# EAGLE board Magnetic-Imaging-Tile-Panel (EAGLE 9.6.2), part 1 of 5
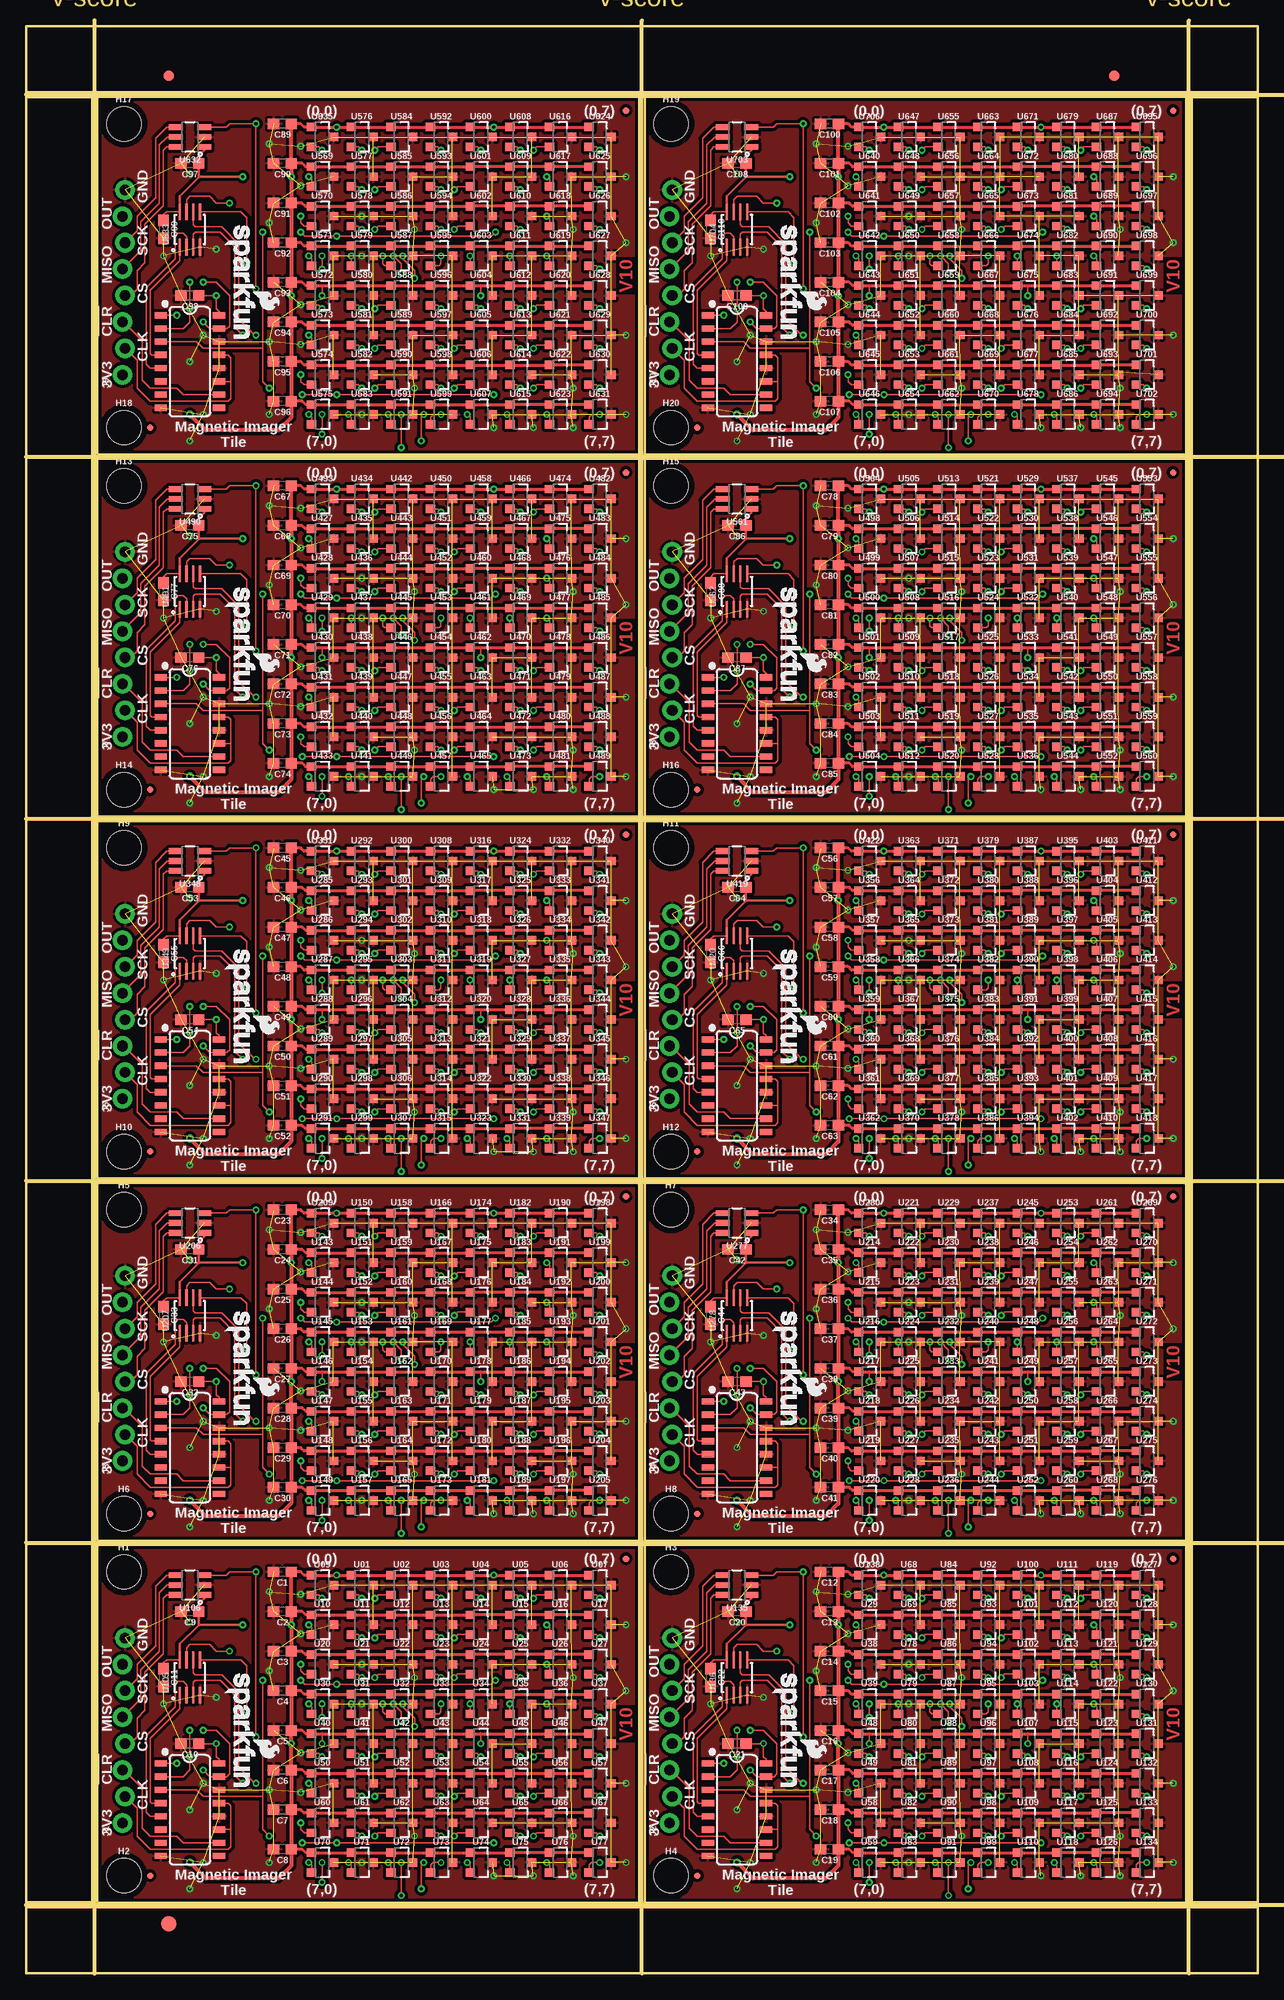
[diagram p0: board, top side]
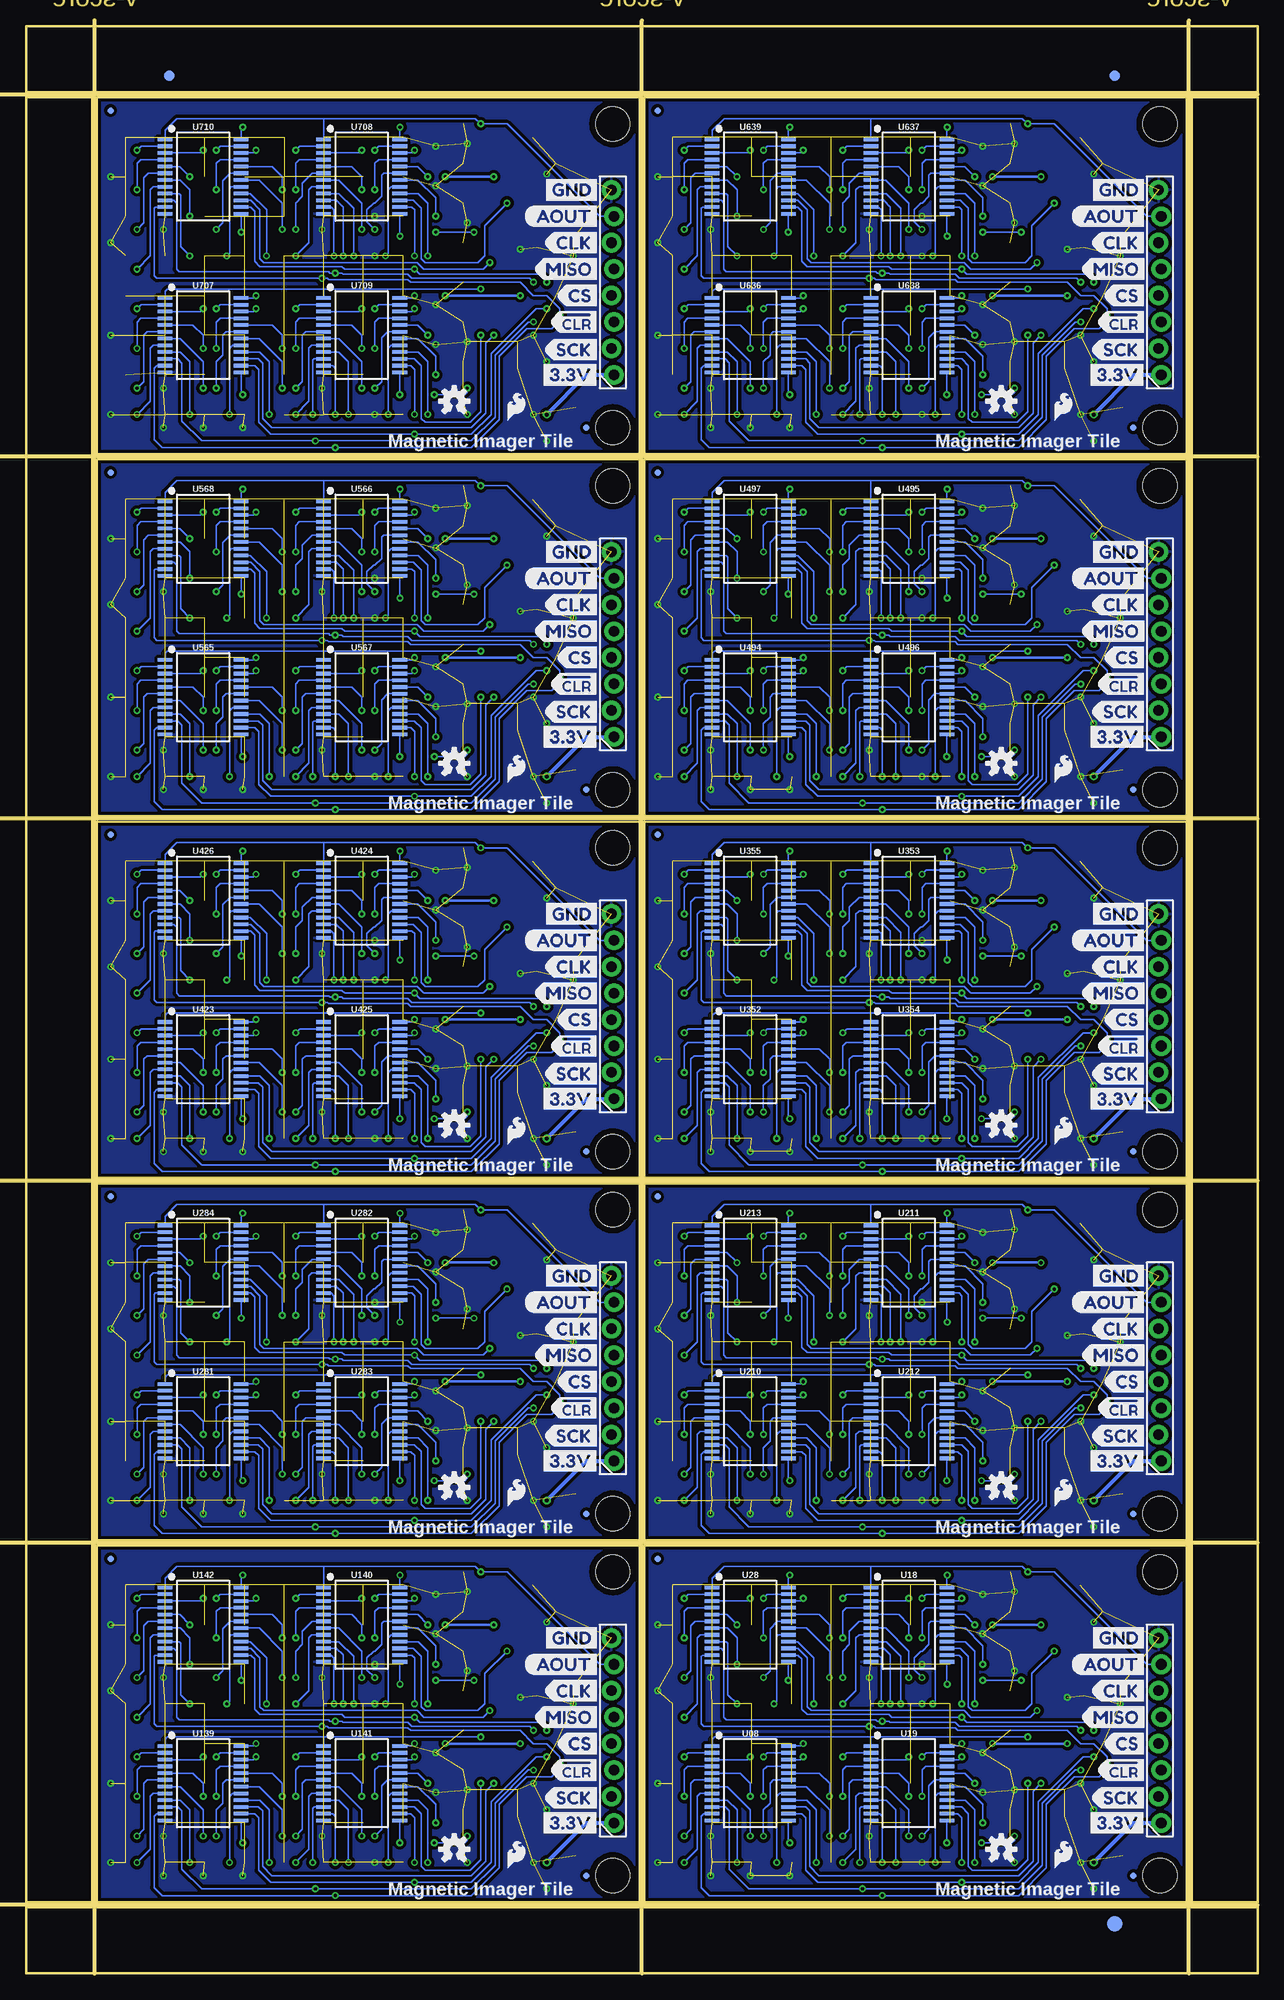
[diagram p1: board, bottom side, seen from below]

Size 118.36 x 187.2 mm. Coordinates in mm from the lower left corner, seen from the top.
Outline: 6.86,6.86 58.93,6.86 58.93,41.15 6.86,41.15 6.86,6.86
Outline: 59.44,6.86 111.51,6.86 111.51,41.15 59.44,41.15 59.44,6.86
Outline: 6.86,41.66 58.93,41.66 58.93,75.95 6.86,75.95 6.86,41.66
Outline: 59.44,41.66 111.51,41.66 111.51,75.95 59.44,75.95 59.44,41.66
Outline: 6.86,76.45 58.93,76.45 58.93,110.74 6.86,110.74 6.86,76.45
Outline: 59.44,76.45 111.51,76.45 111.51,110.74 59.44,110.74 59.44,76.45
Outline: 6.86,111.25 58.93,111.25 58.93,145.54 6.86,145.54 6.86,111.25
Outline: 59.44,111.25 111.51,111.25 111.51,145.54 59.44,145.54 59.44,111.25
Outline: 6.86,146.05 58.93,146.05 58.93,180.34 6.86,180.34 6.86,146.05
Outline: 59.44,146.05 111.51,146.05 111.51,180.34 59.44,180.34 59.44,146.05
Outline: 0,6.35 118.36,6.35 118.36,0 0,0 0,6.35
Outline: 112.01,180.34 118.36,180.34 118.36,6.86 112.01,6.86 112.01,180.34
Outline: 0,187.2 118.36,187.2 118.36,180.85 0,180.85 0,187.2
Outline: 0,180.34 6.35,180.34 6.35,6.86 0,6.86 0,180.34
Copper layers (1*16): Top 0.035mm / dielectric 1.5mm / Bottom 0.035mm
Design rules "Magnetic-Imaging-Tile": minimum track width 6mil, minimum drill 0.3mm, track to track 6mil, track to pad 6mil, pad to pad 6mil, via to via 6mil, smd to smd 6mil, copper to edge 6mil, drill to drill 6mil, minimum pad ring 7mil, minimum via ring 7mil, stop-mask expansion 4mil, vias tented up to drill 25mil, thermal gap 10mil
Milling: 9 lines

## Footprints (pad centres in the part's own frame; a part is rotated, then mirrored left to right if it is on the bottom)
0603 = smd 1.1 x 1: 1 -0.85,0; 2 0.85,0
FIDUCIAL-1X2 = smd 1 x 1: 1 0,0
FIDUCIAL-1.5X3 = smd 1.5 x 1.5: 1 0,0
FIDUCIAL-MICRO = smd 0.635 x 0.635: 1 0,0
STAND-OFF = hole 3.302: 0,0
1X08_LOCK_NO_SILK = drill 1.016 pad 1.88: 1 0,0.127; 2 2.54,-0.127; 3 5.08,0.127; 4 7.62,-0.127; 5 10.16,0.127; 6 12.7,-0.127; 7 15.24,0.127; 8 17.78,-0.127
SOT23-3 = smd 0.8 x 0.9: 1 -0.95,-1; 2 0.95,-1; 3 0,1.1
SSOP24 = smd 0.348 x 1.397: 1 -3.575,-3.656; 2 -2.925,-3.656; 3 -2.275,-3.656; 4 -1.625,-3.656; 5 -0.975,-3.656; 6 -0.325,-3.656; 7 0.325,-3.656; 8 0.975,-3.656; 9 1.625,-3.656; 10 2.275,-3.656; 11 2.925,-3.656; 12 3.575,-3.656; 13 3.575,3.656; 14 2.925,3.656; 15 2.275,3.656; 16 1.625,3.656; 17 0.975,3.656; 18 0.325,3.656; 19 -0.325,3.656; 20 -0.975,3.656; 21 -1.625,3.656; 22 -2.275,3.656; 23 -2.925,3.656; 24 -3.575,3.656
SO16 = smd 0.6 x 1.2: 1 -4.445,-2.8; 2 -3.175,-2.8; 3 -1.905,-2.8; 4 -0.635,-2.8; 5 0.635,-2.8; 6 1.905,-2.8; 7 3.175,-2.8; 8 4.445,-2.8; 9 4.445,2.8; 10 3.175,2.8; 11 1.905,2.8; 12 0.635,2.8; 13 -0.635,2.8; 14 -1.905,2.8; 15 -3.175,2.8; 16 -4.445,2.8
SM8 = smd 1.55 x 0.25: 1 -1.7,0.975; 2 -1.7,0.325; 3 -1.7,-0.325; 4 -1.7,-0.975; 5 1.7,-0.975; 6 1.7,-0.325; 7 1.7,0.325; 8 1.7,0.975
SOT23-6 = smd 0.55 x 1.35: 1 -0.95,-1.375; 2 0,-1.375; 3 0.95,-1.375; 4 0.95,1.375; 5 0,1.375; 6 -0.95,1.375

## Placement (x,y rotation side)
C1  4.7uF  [0603]  24.64,38.61 180 top
C2  4.7uF  [0603]  24.64,34.8 180 top
C3  4.7uF  [0603]  24.64,30.99 180 top
C4  4.7uF  [0603]  24.64,27.18 180 top
C5  4.7uF  [0603]  24.64,23.37 180 top
C6  4.7uF  [0603]  24.64,19.56 180 top
C7  4.7uF  [0603]  24.64,15.75 180 top
C8  4.7uF  [0603]  24.64,11.94 180 top
C9  0.1uF  [0603]  15.75,34.8 180 top
C10  0.1uF  [0603]  15.75,22.1 180 top
C11  0.1uF  [0603]  13.21,28.45 270 top
C12  4.7uF  [0603]  77.22,38.61 180 top
C13  4.7uF  [0603]  77.22,34.8 180 top
C14  4.7uF  [0603]  77.22,30.99 180 top
C15  4.7uF  [0603]  77.22,27.18 180 top
C16  4.7uF  [0603]  77.22,23.37 180 top
C17  4.7uF  [0603]  77.22,19.56 180 top
C18  4.7uF  [0603]  77.22,15.75 180 top
C19  4.7uF  [0603]  77.22,11.94 180 top
C20  0.1uF  [0603]  68.33,34.8 180 top
C21  0.1uF  [0603]  68.33,22.1 180 top
C22  0.1uF  [0603]  65.79,28.45 270 top
C23  4.7uF  [0603]  24.64,73.41 180 top
C24  4.7uF  [0603]  24.64,69.6 180 top
C25  4.7uF  [0603]  24.64,65.79 180 top
C26  4.7uF  [0603]  24.64,61.98 180 top
C27  4.7uF  [0603]  24.64,58.17 180 top
C28  4.7uF  [0603]  24.64,54.36 180 top
C29  4.7uF  [0603]  24.64,50.55 180 top
C30  4.7uF  [0603]  24.64,46.74 180 top
C31  0.1uF  [0603]  15.75,69.6 180 top
C32  0.1uF  [0603]  15.75,56.9 180 top
C33  0.1uF  [0603]  13.21,63.25 270 top
C34  4.7uF  [0603]  77.22,73.41 180 top
C35  4.7uF  [0603]  77.22,69.6 180 top
C36  4.7uF  [0603]  77.22,65.79 180 top
C37  4.7uF  [0603]  77.22,61.98 180 top
C38  4.7uF  [0603]  77.22,58.17 180 top
C39  4.7uF  [0603]  77.22,54.36 180 top
C40  4.7uF  [0603]  77.22,50.55 180 top
C41  4.7uF  [0603]  77.22,46.74 180 top
C42  0.1uF  [0603]  68.33,69.6 180 top
C43  0.1uF  [0603]  68.33,56.9 180 top
C44  0.1uF  [0603]  65.79,63.25 270 top
C45  4.7uF  [0603]  24.64,108.2 180 top
C46  4.7uF  [0603]  24.64,104.39 180 top
C47  4.7uF  [0603]  24.64,100.58 180 top
C48  4.7uF  [0603]  24.64,96.77 180 top
C49  4.7uF  [0603]  24.64,92.96 180 top
C50  4.7uF  [0603]  24.64,89.15 180 top
C51  4.7uF  [0603]  24.64,85.34 180 top
C52  4.7uF  [0603]  24.64,81.53 180 top
C53  0.1uF  [0603]  15.75,104.39 180 top
C54  0.1uF  [0603]  15.75,91.69 180 top
C55  0.1uF  [0603]  13.21,98.04 270 top
C56  4.7uF  [0603]  77.22,108.2 180 top
C57  4.7uF  [0603]  77.22,104.39 180 top
C58  4.7uF  [0603]  77.22,100.58 180 top
C59  4.7uF  [0603]  77.22,96.77 180 top
C60  4.7uF  [0603]  77.22,92.96 180 top
C61  4.7uF  [0603]  77.22,89.15 180 top
C62  4.7uF  [0603]  77.22,85.34 180 top
C63  4.7uF  [0603]  77.22,81.53 180 top
C64  0.1uF  [0603]  68.33,104.39 180 top
C65  0.1uF  [0603]  68.33,91.69 180 top
C66  0.1uF  [0603]  65.79,98.04 270 top
C67  4.7uF  [0603]  24.64,143 180 top
C68  4.7uF  [0603]  24.64,139.19 180 top
C69  4.7uF  [0603]  24.64,135.38 180 top
C70  4.7uF  [0603]  24.64,131.57 180 top
C71  4.7uF  [0603]  24.64,127.76 180 top
C72  4.7uF  [0603]  24.64,123.95 180 top
C73  4.7uF  [0603]  24.64,120.14 180 top
C74  4.7uF  [0603]  24.64,116.33 180 top
C75  0.1uF  [0603]  15.75,139.19 180 top
C76  0.1uF  [0603]  15.75,126.49 180 top
C77  0.1uF  [0603]  13.21,132.84 270 top
C78  4.7uF  [0603]  77.22,143 180 top
C79  4.7uF  [0603]  77.22,139.19 180 top
C80  4.7uF  [0603]  77.22,135.38 180 top
C81  4.7uF  [0603]  77.22,131.57 180 top
C82  4.7uF  [0603]  77.22,127.76 180 top
C83  4.7uF  [0603]  77.22,123.95 180 top
C84  4.7uF  [0603]  77.22,120.14 180 top
C85  4.7uF  [0603]  77.22,116.33 180 top
C86  0.1uF  [0603]  68.33,139.19 180 top
C87  0.1uF  [0603]  68.33,126.49 180 top
C88  0.1uF  [0603]  65.79,132.84 270 top
C89  4.7uF  [0603]  24.64,177.8 180 top
C90  4.7uF  [0603]  24.64,173.99 180 top
C91  4.7uF  [0603]  24.64,170.18 180 top
C92  4.7uF  [0603]  24.64,166.37 180 top
C93  4.7uF  [0603]  24.64,162.56 180 top
C94  4.7uF  [0603]  24.64,158.75 180 top
C95  4.7uF  [0603]  24.64,154.94 180 top
C96  4.7uF  [0603]  24.64,151.13 180 top
C97  0.1uF  [0603]  15.75,173.99 180 top
C98  0.1uF  [0603]  15.75,161.29 180 top
C99  0.1uF  [0603]  13.21,167.64 270 top
C100  4.7uF  [0603]  77.22,177.8 180 top
C101  4.7uF  [0603]  77.22,173.99 180 top
C102  4.7uF  [0603]  77.22,170.18 180 top
C103  4.7uF  [0603]  77.22,166.37 180 top
C104  4.7uF  [0603]  77.22,162.56 180 top
C105  4.7uF  [0603]  77.22,158.75 180 top
C106  4.7uF  [0603]  77.22,154.94 180 top
C107  4.7uF  [0603]  77.22,151.13 180 top
C108  0.1uF  [0603]  68.33,173.99 180 top
C109  0.1uF  [0603]  68.33,161.29 180 top
C110  0.1uF  [0603]  65.79,167.64 270 top
E$1  [FIDUCIAL-1X2]  13.72,182.44 0 top
E$2  [FIDUCIAL-1X2]  13.72,182.44 0 bottom
E$3  [FIDUCIAL-1X2]  104.58,182.44 0 top
E$4  [FIDUCIAL-1X2]  104.58,182.44 0 bottom
E$5  [FIDUCIAL-1.5X3]  13.72,4.76 0 top
E$6  [FIDUCIAL-1.5X3]  13.72,4.76 0 bottom
FD1  FIDUCIALUFIDUCIAL  [FIDUCIAL-MICRO]  57.66,39.88 90 top
FD2  FIDUCIALUFIDUCIAL  [FIDUCIAL-MICRO]  11.94,9.4 90 top
FD3  FIDUCIALUFIDUCIAL  [FIDUCIAL-MICRO]  11.94,9.4 90 bottom
FD4  FIDUCIALUFIDUCIAL  [FIDUCIAL-MICRO]  57.66,39.88 90 bottom
FD5  FIDUCIALUFIDUCIAL  [FIDUCIAL-MICRO]  110.24,39.88 90 top
FD6  FIDUCIALUFIDUCIAL  [FIDUCIAL-MICRO]  64.52,9.4 90 top
FD7  FIDUCIALUFIDUCIAL  [FIDUCIAL-MICRO]  64.52,9.4 90 bottom
FD8  FIDUCIALUFIDUCIAL  [FIDUCIAL-MICRO]  110.24,39.88 90 bottom
FD9  FIDUCIALUFIDUCIAL  [FIDUCIAL-MICRO]  57.66,74.68 90 top
FD10  FIDUCIALUFIDUCIAL  [FIDUCIAL-MICRO]  11.94,44.2 90 top
FD11  FIDUCIALUFIDUCIAL  [FIDUCIAL-MICRO]  11.94,44.2 90 bottom
FD12  FIDUCIALUFIDUCIAL  [FIDUCIAL-MICRO]  57.66,74.68 90 bottom
FD13  FIDUCIALUFIDUCIAL  [FIDUCIAL-MICRO]  110.24,74.68 90 top
FD14  FIDUCIALUFIDUCIAL  [FIDUCIAL-MICRO]  64.52,44.2 90 top
FD15  FIDUCIALUFIDUCIAL  [FIDUCIAL-MICRO]  64.52,44.2 90 bottom
FD16  FIDUCIALUFIDUCIAL  [FIDUCIAL-MICRO]  110.24,74.68 90 bottom
FD17  FIDUCIALUFIDUCIAL  [FIDUCIAL-MICRO]  57.66,109.47 90 top
FD18  FIDUCIALUFIDUCIAL  [FIDUCIAL-MICRO]  11.94,78.99 90 top
FD19  FIDUCIALUFIDUCIAL  [FIDUCIAL-MICRO]  11.94,78.99 90 bottom
FD20  FIDUCIALUFIDUCIAL  [FIDUCIAL-MICRO]  57.66,109.47 90 bottom
FD21  FIDUCIALUFIDUCIAL  [FIDUCIAL-MICRO]  110.24,109.47 90 top
FD22  FIDUCIALUFIDUCIAL  [FIDUCIAL-MICRO]  64.52,78.99 90 top
FD23  FIDUCIALUFIDUCIAL  [FIDUCIAL-MICRO]  64.52,78.99 90 bottom
FD24  FIDUCIALUFIDUCIAL  [FIDUCIAL-MICRO]  110.24,109.47 90 bottom
FD25  FIDUCIALUFIDUCIAL  [FIDUCIAL-MICRO]  57.66,144.27 90 top
FD26  FIDUCIALUFIDUCIAL  [FIDUCIAL-MICRO]  11.94,113.79 90 top
FD27  FIDUCIALUFIDUCIAL  [FIDUCIAL-MICRO]  11.94,113.79 90 bottom
FD28  FIDUCIALUFIDUCIAL  [FIDUCIAL-MICRO]  57.66,144.27 90 bottom
FD29  FIDUCIALUFIDUCIAL  [FIDUCIAL-MICRO]  110.24,144.27 90 top
FD30  FIDUCIALUFIDUCIAL  [FIDUCIAL-MICRO]  64.52,113.79 90 top
FD31  FIDUCIALUFIDUCIAL  [FIDUCIAL-MICRO]  64.52,113.79 90 bottom
FD32  FIDUCIALUFIDUCIAL  [FIDUCIAL-MICRO]  110.24,144.27 90 bottom
FD33  FIDUCIALUFIDUCIAL  [FIDUCIAL-MICRO]  57.66,179.07 90 top
FD34  FIDUCIALUFIDUCIAL  [FIDUCIAL-MICRO]  11.94,148.59 90 top
FD35  FIDUCIALUFIDUCIAL  [FIDUCIAL-MICRO]  11.94,148.59 90 bottom
FD36  FIDUCIALUFIDUCIAL  [FIDUCIAL-MICRO]  57.66,179.07 90 bottom
FD37  FIDUCIALUFIDUCIAL  [FIDUCIAL-MICRO]  110.24,179.07 90 top
FD38  FIDUCIALUFIDUCIAL  [FIDUCIAL-MICRO]  64.52,148.59 90 top
FD39  FIDUCIALUFIDUCIAL  [FIDUCIAL-MICRO]  64.52,148.59 90 bottom
FD40  FIDUCIALUFIDUCIAL  [FIDUCIAL-MICRO]  110.24,179.07 90 bottom
H1  STAND-OFF  [STAND-OFF]  9.4,38.61 0 top
H2  STAND-OFF  [STAND-OFF]  9.4,9.4 0 top
H3  STAND-OFF  [STAND-OFF]  61.98,38.61 0 top
H4  STAND-OFF  [STAND-OFF]  61.98,9.4 0 top
H5  STAND-OFF  [STAND-OFF]  9.4,73.41 0 top
H6  STAND-OFF  [STAND-OFF]  9.4,44.2 0 top
H7  STAND-OFF  [STAND-OFF]  61.98,73.41 0 top
H8  STAND-OFF  [STAND-OFF]  61.98,44.2 0 top
H9  STAND-OFF  [STAND-OFF]  9.4,108.2 0 top
H10  STAND-OFF  [STAND-OFF]  9.4,78.99 0 top
H11  STAND-OFF  [STAND-OFF]  61.98,108.2 0 top
H12  STAND-OFF  [STAND-OFF]  61.98,78.99 0 top
H13  STAND-OFF  [STAND-OFF]  9.4,143 0 top
H14  STAND-OFF  [STAND-OFF]  9.4,113.79 0 top
H15  STAND-OFF  [STAND-OFF]  61.98,143 0 top
H16  STAND-OFF  [STAND-OFF]  61.98,113.79 0 top
H17  STAND-OFF  [STAND-OFF]  9.4,177.8 0 top
H18  STAND-OFF  [STAND-OFF]  9.4,148.59 0 top
H19  STAND-OFF  [STAND-OFF]  61.98,177.8 0 top
H20  STAND-OFF  [STAND-OFF]  61.98,148.59 0 top
J1  [1X08_LOCK_NO_SILK]  9.4,14.48 90 top
J2  [1X08_LOCK_NO_SILK]  61.98,14.48 90 top
J3  [1X08_LOCK_NO_SILK]  9.4,49.28 90 top
J4  [1X08_LOCK_NO_SILK]  61.98,49.28 90 top
J5  [1X08_LOCK_NO_SILK]  9.4,84.07 90 top
J6  [1X08_LOCK_NO_SILK]  61.98,84.07 90 top
J7  [1X08_LOCK_NO_SILK]  9.4,118.87 90 top
J8  [1X08_LOCK_NO_SILK]  61.98,118.87 90 top
J9  [1X08_LOCK_NO_SILK]  9.4,153.67 90 top
J10  [1X08_LOCK_NO_SILK]  61.98,153.67 90 top
LOGO1  SFE_LOGO_NAME.1_INCH  [SFE_LOGO_NAME_.1]  73.15,23.37 270 top
LOGO2  OSHW-LOGOS  [OSHW-LOGO-S]  77.22,11.94 0 bottom
LOGO3  SFE_LOGO_NAME.1_INCH  [SFE_LOGO_NAME_.1]  20.57,23.37 270 top
LOGO4  OSHW-LOGOS  [OSHW-LOGO-S]  24.64,11.94 0 bottom
LOGO5  SFE_LOGO_NAME.1_INCH  [SFE_LOGO_NAME_.1]  20.57,58.17 270 top
LOGO6  OSHW-LOGOS  [OSHW-LOGO-S]  24.64,46.74 0 bottom
LOGO7  SFE_LOGO_NAME.1_INCH  [SFE_LOGO_NAME_.1]  73.15,58.17 270 top
LOGO8  OSHW-LOGOS  [OSHW-LOGO-S]  77.22,46.74 0 bottom
LOGO9  SFE_LOGO_NAME.1_INCH  [SFE_LOGO_NAME_.1]  20.57,92.96 270 top
LOGO10  OSHW-LOGOS  [OSHW-LOGO-S]  24.64,81.53 0 bottom
LOGO11  SFE_LOGO_NAME.1_INCH  [SFE_LOGO_NAME_.1]  73.15,92.96 270 top
LOGO12  OSHW-LOGOS  [OSHW-LOGO-S]  77.22,81.53 0 bottom
LOGO13  SFE_LOGO_NAME.1_INCH  [SFE_LOGO_NAME_.1]  20.57,127.76 270 top
LOGO14  OSHW-LOGOS  [OSHW-LOGO-S]  24.64,116.33 0 bottom
LOGO15  SFE_LOGO_NAME.1_INCH  [SFE_LOGO_NAME_.1]  73.15,127.76 270 top
LOGO16  OSHW-LOGOS  [OSHW-LOGO-S]  77.22,116.33 0 bottom
LOGO17  SFE_LOGO_NAME.1_INCH  [SFE_LOGO_NAME_.1]  20.57,162.56 270 top
LOGO18  OSHW-LOGOS  [OSHW-LOGO-S]  24.64,151.13 0 bottom
LOGO19  SFE_LOGO_NAME.1_INCH  [SFE_LOGO_NAME_.1]  73.15,162.56 270 top
LOGO20  OSHW-LOGOS  [OSHW-LOGO-S]  77.22,151.13 0 bottom
U01  DRV5053  [SOT23-3]  32.26,37.34 270 top
U02  DRV5053  [SOT23-3]  36.07,37.34 270 top
U03  DRV5053  [SOT23-3]  39.88,37.34 270 top
U04  DRV5053  [SOT23-3]  43.69,37.34 270 top
U05  DRV5053  [SOT23-3]  47.5,37.34 270 top
U06  DRV5053  [SOT23-3]  51.31,37.34 270 top
U07  DRV5053  [SOT23-3]  55.12,37.34 270 top
U08  CD74HC4067  [SSOP24]  48.77,18.29 270 bottom
U09  DRV5053  [SOT23-3]  28.45,37.34 270 top
U10  DRV5053  [SOT23-3]  28.45,33.53 270 top
U11  DRV5053  [SOT23-3]  32.26,33.53 270 top
U12  DRV5053  [SOT23-3]  36.07,33.53 270 top
U13  DRV5053  [SOT23-3]  39.88,33.53 270 top
U14  DRV5053  [SOT23-3]  43.69,33.53 270 top
U15  DRV5053  [SOT23-3]  47.5,33.53 270 top
U16  DRV5053  [SOT23-3]  51.31,33.53 270 top
U17  DRV5053  [SOT23-3]  55.12,33.53 270 top
U18  CD74HC4067  [SSOP24]  33.53,33.53 270 bottom
U19  CD74HC4067  [SSOP24]  33.53,18.29 270 bottom
U20  DRV5053  [SOT23-3]  28.45,29.72 270 top
U21  DRV5053  [SOT23-3]  32.26,29.72 270 top
U22  DRV5053  [SOT23-3]  36.07,29.72 270 top
U23  DRV5053  [SOT23-3]  39.88,29.72 270 top
U24  DRV5053  [SOT23-3]  43.69,29.72 270 top
U25  DRV5053  [SOT23-3]  47.5,29.72 270 top
U26  DRV5053  [SOT23-3]  51.31,29.72 270 top
U27  DRV5053  [SOT23-3]  55.12,29.72 270 top
U28  CD74HC4067  [SSOP24]  48.77,33.53 270 bottom
U29  DRV5053  [SOT23-3]  81.03,33.53 270 top
U30  DRV5053  [SOT23-3]  28.45,25.91 270 top
U31  DRV5053  [SOT23-3]  32.26,25.91 270 top
U32  DRV5053  [SOT23-3]  36.07,25.91 270 top
U33  DRV5053  [SOT23-3]  39.88,25.91 270 top
U34  DRV5053  [SOT23-3]  43.69,25.91 270 top
U35  DRV5053  [SOT23-3]  47.5,25.91 270 top
U36  DRV5053  [SOT23-3]  51.31,25.91 270 top
U37  DRV5053  [SOT23-3]  55.12,25.91 270 top
U38  DRV5053  [SOT23-3]  81.03,29.72 270 top
U39  DRV5053  [SOT23-3]  81.03,25.91 270 top
U40  DRV5053  [SOT23-3]  28.45,22.1 270 top
U41  DRV5053  [SOT23-3]  32.26,22.1 270 top
U42  DRV5053  [SOT23-3]  36.07,22.1 270 top
U43  DRV5053  [SOT23-3]  39.88,22.1 270 top
U44  DRV5053  [SOT23-3]  43.69,22.1 270 top
U45  DRV5053  [SOT23-3]  47.5,22.1 270 top
U46  DRV5053  [SOT23-3]  51.31,22.1 270 top
U47  DRV5053  [SOT23-3]  55.12,22.1 270 top
U48  DRV5053  [SOT23-3]  81.03,22.1 270 top
U49  DRV5053  [SOT23-3]  81.03,18.29 270 top
U50  DRV5053  [SOT23-3]  28.45,18.29 270 top
U51  DRV5053  [SOT23-3]  32.26,18.29 270 top
U52  DRV5053  [SOT23-3]  36.07,18.29 270 top
U53  DRV5053  [SOT23-3]  39.88,18.29 270 top
U54  DRV5053  [SOT23-3]  43.69,18.29 270 top
U55  DRV5053  [SOT23-3]  47.5,18.29 270 top
U56  DRV5053  [SOT23-3]  51.31,18.29 270 top
U57  DRV5053  [SOT23-3]  55.12,18.29 270 top
U58  DRV5053  [SOT23-3]  81.03,14.48 270 top
U59  DRV5053  [SOT23-3]  81.03,10.67 270 top
U60  DRV5053  [SOT23-3]  28.45,14.48 270 top
U61  DRV5053  [SOT23-3]  32.26,14.48 270 top
U62  DRV5053  [SOT23-3]  36.07,14.48 270 top
U63  DRV5053  [SOT23-3]  39.88,14.48 270 top
U64  DRV5053  [SOT23-3]  43.69,14.48 270 top
U65  DRV5053  [SOT23-3]  47.5,14.48 270 top
U66  DRV5053  [SOT23-3]  51.31,14.48 270 top
U67  DRV5053  [SOT23-3]  55.12,14.48 270 top
U68  DRV5053  [SOT23-3]  84.84,37.34 270 top
U69  DRV5053  [SOT23-3]  84.84,33.53 270 top
U70  DRV5053  [SOT23-3]  28.45,10.67 270 top
U71  DRV5053  [SOT23-3]  32.26,10.67 270 top
U72  DRV5053  [SOT23-3]  36.07,10.67 270 top
U73  DRV5053  [SOT23-3]  39.88,10.67 270 top
U74  DRV5053  [SOT23-3]  43.69,10.67 270 top
U75  DRV5053  [SOT23-3]  47.5,10.67 270 top
U76  DRV5053  [SOT23-3]  51.31,10.67 270 top
U77  DRV5053  [SOT23-3]  55.12,10.67 270 top
U78  DRV5053  [SOT23-3]  84.84,29.72 270 top
U79  DRV5053  [SOT23-3]  84.84,25.91 270 top
U80  DRV5053  [SOT23-3]  84.84,22.1 270 top
U81  DRV5053  [SOT23-3]  84.84,18.29 270 top
U82  DRV5053  [SOT23-3]  84.84,14.48 270 top
U83  DRV5053  [SOT23-3]  84.84,10.67 270 top
U84  DRV5053  [SOT23-3]  88.65,37.34 270 top
U85  DRV5053  [SOT23-3]  88.65,33.53 270 top
U86  DRV5053  [SOT23-3]  88.65,29.72 270 top
U87  DRV5053  [SOT23-3]  88.65,25.91 270 top
U88  DRV5053  [SOT23-3]  88.65,22.1 270 top
U89  DRV5053  [SOT23-3]  88.65,18.29 270 top
U90  DRV5053  [SOT23-3]  88.65,14.48 270 top
U91  DRV5053  [SOT23-3]  88.65,10.67 270 top
U92  DRV5053  [SOT23-3]  92.46,37.34 270 top
U93  DRV5053  [SOT23-3]  92.46,33.53 270 top
U94  DRV5053  [SOT23-3]  92.46,29.72 270 top
U95  DRV5053  [SOT23-3]  92.46,25.91 270 top
U96  DRV5053  [SOT23-3]  92.46,22.1 270 top
U97  DRV5053  [SOT23-3]  92.46,18.29 270 top
U98  DRV5053  [SOT23-3]  92.46,14.48 270 top
U99  DRV5053  [SOT23-3]  92.46,10.67 270 top
U100  DRV5053  [SOT23-3]  96.27,37.34 270 top
U101  DRV5053  [SOT23-3]  96.27,33.53 270 top
U102  DRV5053  [SOT23-3]  96.27,29.72 270 top
U103  DRV5053  [SOT23-3]  96.27,25.91 270 top
U104  SN74HC590A  [SO16]  15.75,15.75 270 top
U105  SN74LVC1G139  [SM8]  15.75,28.45 90 top
U106  AD7680  [SOT23-6]  15.75,37.34 90 top
U107  DRV5053  [SOT23-3]  96.27,22.1 270 top
U108  DRV5053  [SOT23-3]  96.27,18.29 270 top
U109  DRV5053  [SOT23-3]  96.27,14.48 270 top
U110  DRV5053  [SOT23-3]  96.27,10.67 270 top
U111  DRV5053  [SOT23-3]  100.08,37.34 270 top
U112  DRV5053  [SOT23-3]  100.08,33.53 270 top
U113  DRV5053  [SOT23-3]  100.08,29.72 270 top
U114  DRV5053  [SOT23-3]  100.08,25.91 270 top
U115  DRV5053  [SOT23-3]  100.08,22.1 270 top
U116  DRV5053  [SOT23-3]  100.08,18.29 270 top
U117  DRV5053  [SOT23-3]  100.08,14.48 270 top
U118  DRV5053  [SOT23-3]  100.08,10.67 270 top
U119  DRV5053  [SOT23-3]  103.89,37.34 270 top
U120  DRV5053  [SOT23-3]  103.89,33.53 270 top
U121  DRV5053  [SOT23-3]  103.89,29.72 270 top
U122  DRV5053  [SOT23-3]  103.89,25.91 270 top
U123  DRV5053  [SOT23-3]  103.89,22.1 270 top
U124  DRV5053  [SOT23-3]  103.89,18.29 270 top
U125  DRV5053  [SOT23-3]  103.89,14.48 270 top
U126  DRV5053  [SOT23-3]  103.89,10.67 270 top
U127  DRV5053  [SOT23-3]  107.7,37.34 270 top
U128  DRV5053  [SOT23-3]  107.7,33.53 270 top
U129  DRV5053  [SOT23-3]  107.7,29.72 270 top
U130  DRV5053  [SOT23-3]  107.7,25.91 270 top
U131  DRV5053  [SOT23-3]  107.7,22.1 270 top
U132  DRV5053  [SOT23-3]  107.7,18.29 270 top
U133  DRV5053  [SOT23-3]  107.7,14.48 270 top
U134  DRV5053  [SOT23-3]  107.7,10.67 270 top
U135  AD7680  [SOT23-6]  68.33,37.34 90 top
U136  SN74LVC1G139  [SM8]  68.33,28.45 90 top
U137  SN74HC590A  [SO16]  68.33,15.75 270 top
U138  DRV5053  [SOT23-3]  81.03,37.34 270 top
U139  CD74HC4067  [SSOP24]  101.35,18.29 270 bottom
U140  CD74HC4067  [SSOP24]  86.11,33.53 270 bottom
U141  CD74HC4067  [SSOP24]  86.11,18.29 270 bottom
U142  CD74HC4067  [SSOP24]  101.35,33.53 270 bottom
U143  DRV5053  [SOT23-3]  28.45,68.33 270 top
U144  DRV5053  [SOT23-3]  28.45,64.52 270 top
U145  DRV5053  [SOT23-3]  28.45,60.71 270 top
U146  DRV5053  [SOT23-3]  28.45,56.9 270 top
U147  DRV5053  [SOT23-3]  28.45,53.09 270 top
U148  DRV5053  [SOT23-3]  28.45,49.28 270 top
U149  DRV5053  [SOT23-3]  28.45,45.47 270 top
U150  DRV5053  [SOT23-3]  32.26,72.14 270 top
U151  DRV5053  [SOT23-3]  32.26,68.33 270 top
U152  DRV5053  [SOT23-3]  32.26,64.52 270 top
U153  DRV5053  [SOT23-3]  32.26,60.71 270 top
U154  DRV5053  [SOT23-3]  32.26,56.9 270 top
U155  DRV5053  [SOT23-3]  32.26,53.09 270 top
U156  DRV5053  [SOT23-3]  32.26,49.28 270 top
U157  DRV5053  [SOT23-3]  32.26,45.47 270 top
U158  DRV5053  [SOT23-3]  36.07,72.14 270 top
U159  DRV5053  [SOT23-3]  36.07,68.33 270 top
U160  DRV5053  [SOT23-3]  36.07,64.52 270 top
U161  DRV5053  [SOT23-3]  36.07,60.71 270 top
U162  DRV5053  [SOT23-3]  36.07,56.9 270 top
U163  DRV5053  [SOT23-3]  36.07,53.09 270 top
U164  DRV5053  [SOT23-3]  36.07,49.28 270 top
U165  DRV5053  [SOT23-3]  36.07,45.47 270 top
U166  DRV5053  [SOT23-3]  39.88,72.14 270 top
U167  DRV5053  [SOT23-3]  39.88,68.33 270 top
U168  DRV5053  [SOT23-3]  39.88,64.52 270 top
U169  DRV5053  [SOT23-3]  39.88,60.71 270 top
U170  DRV5053  [SOT23-3]  39.88,56.9 270 top
U171  DRV5053  [SOT23-3]  39.88,53.09 270 top
U172  DRV5053  [SOT23-3]  39.88,49.28 270 top
U173  DRV5053  [SOT23-3]  39.88,45.47 270 top
U174  DRV5053  [SOT23-3]  43.69,72.14 270 top
U175  DRV5053  [SOT23-3]  43.69,68.33 270 top
U176  DRV5053  [SOT23-3]  43.69,64.52 270 top
U177  DRV5053  [SOT23-3]  43.69,60.71 270 top
U178  DRV5053  [SOT23-3]  43.69,56.9 270 top
U179  DRV5053  [SOT23-3]  43.69,53.09 270 top
U180  DRV5053  [SOT23-3]  43.69,49.28 270 top
U181  DRV5053  [SOT23-3]  43.69,45.47 270 top
U182  DRV5053  [SOT23-3]  47.5,72.14 270 top
U183  DRV5053  [SOT23-3]  47.5,68.33 270 top
U184  DRV5053  [SOT23-3]  47.5,64.52 270 top
U185  DRV5053  [SOT23-3]  47.5,60.71 270 top
U186  DRV5053  [SOT23-3]  47.5,56.9 270 top
U187  DRV5053  [SOT23-3]  47.5,53.09 270 top
U188  DRV5053  [SOT23-3]  47.5,49.28 270 top
U189  DRV5053  [SOT23-3]  47.5,45.47 270 top
U190  DRV5053  [SOT23-3]  51.31,72.14 270 top
U191  DRV5053  [SOT23-3]  51.31,68.33 270 top
U192  DRV5053  [SOT23-3]  51.31,64.52 270 top
U193  DRV5053  [SOT23-3]  51.31,60.71 270 top
U194  DRV5053  [SOT23-3]  51.31,56.9 270 top
U195  DRV5053  [SOT23-3]  51.31,53.09 270 top
U196  DRV5053  [SOT23-3]  51.31,49.28 270 top
U197  DRV5053  [SOT23-3]  51.31,45.47 270 top
U198  DRV5053  [SOT23-3]  55.12,72.14 270 top
U199  DRV5053  [SOT23-3]  55.12,68.33 270 top
U200  DRV5053  [SOT23-3]  55.12,64.52 270 top
U201  DRV5053  [SOT23-3]  55.12,60.71 270 top
U202  DRV5053  [SOT23-3]  55.12,56.9 270 top
U203  DRV5053  [SOT23-3]  55.12,53.09 270 top
U204  DRV5053  [SOT23-3]  55.12,49.28 270 top
U205  DRV5053  [SOT23-3]  55.12,45.47 270 top
U206  AD7680  [SOT23-6]  15.75,72.14 90 top
U207  SN74LVC1G139  [SM8]  15.75,63.25 90 top
U208  SN74HC590A  [SO16]  15.75,50.55 270 top
U209  DRV5053  [SOT23-3]  28.45,72.14 270 top
U210  CD74HC4067  [SSOP24]  48.77,53.09 270 bottom
U211  CD74HC4067  [SSOP24]  33.53,68.33 270 bottom
U212  CD74HC4067  [SSOP24]  33.53,53.09 270 bottom
U213  CD74HC4067  [SSOP24]  48.77,68.33 270 bottom
U214  DRV5053  [SOT23-3]  81.03,68.33 270 top
U215  DRV5053  [SOT23-3]  81.03,64.52 270 top
U216  DRV5053  [SOT23-3]  81.03,60.71 270 top
U217  DRV5053  [SOT23-3]  81.03,56.9 270 top
U218  DRV5053  [SOT23-3]  81.03,53.09 270 top
U219  DRV5053  [SOT23-3]  81.03,49.28 270 top
U220  DRV5053  [SOT23-3]  81.03,45.47 270 top
U221  DRV5053  [SOT23-3]  84.84,72.14 270 top
U222  DRV5053  [SOT23-3]  84.84,68.33 270 top
U223  DRV5053  [SOT23-3]  84.84,64.52 270 top
U224  DRV5053  [SOT23-3]  84.84,60.71 270 top
U225  DRV5053  [SOT23-3]  84.84,56.9 270 top
U226  DRV5053  [SOT23-3]  84.84,53.09 270 top
U227  DRV5053  [SOT23-3]  84.84,49.28 270 top
U228  DRV5053  [SOT23-3]  84.84,45.47 270 top
U229  DRV5053  [SOT23-3]  88.65,72.14 270 top
U230  DRV5053  [SOT23-3]  88.65,68.33 270 top
U231  DRV5053  [SOT23-3]  88.65,64.52 270 top
U232  DRV5053  [SOT23-3]  88.65,60.71 270 top
U233  DRV5053  [SOT23-3]  88.65,56.9 270 top
U234  DRV5053  [SOT23-3]  88.65,53.09 270 top
U235  DRV5053  [SOT23-3]  88.65,49.28 270 top
U236  DRV5053  [SOT23-3]  88.65,45.47 270 top
U237  DRV5053  [SOT23-3]  92.46,72.14 270 top
U238  DRV5053  [SOT23-3]  92.46,68.33 270 top
U239  DRV5053  [SOT23-3]  92.46,64.52 270 top
U240  DRV5053  [SOT23-3]  92.46,60.71 270 top
U241  DRV5053  [SOT23-3]  92.46,56.9 270 top
U242  DRV5053  [SOT23-3]  92.46,53.09 270 top
U243  DRV5053  [SOT23-3]  92.46,49.28 270 top
U244  DRV5053  [SOT23-3]  92.46,45.47 270 top
U245  DRV5053  [SOT23-3]  96.27,72.14 270 top
U246  DRV5053  [SOT23-3]  96.27,68.33 270 top
U247  DRV5053  [SOT23-3]  96.27,64.52 270 top
U248  DRV5053  [SOT23-3]  96.27,60.71 270 top
U249  DRV5053  [SOT23-3]  96.27,56.9 270 top
U250  DRV5053  [SOT23-3]  96.27,53.09 270 top
U251  DRV5053  [SOT23-3]  96.27,49.28 270 top
U252  DRV5053  [SOT23-3]  96.27,45.47 270 top
U253  DRV5053  [SOT23-3]  100.08,72.14 270 top
U254  DRV5053  [SOT23-3]  100.08,68.33 270 top
U255  DRV5053  [SOT23-3]  100.08,64.52 270 top
U256  DRV5053  [SOT23-3]  100.08,60.71 270 top
U257  DRV5053  [SOT23-3]  100.08,56.9 270 top
U258  DRV5053  [SOT23-3]  100.08,53.09 270 top
U259  DRV5053  [SOT23-3]  100.08,49.28 270 top
U260  DRV5053  [SOT23-3]  100.08,45.47 270 top
U261  DRV5053  [SOT23-3]  103.89,72.14 270 top
U262  DRV5053  [SOT23-3]  103.89,68.33 270 top
U263  DRV5053  [SOT23-3]  103.89,64.52 270 top
U264  DRV5053  [SOT23-3]  103.89,60.71 270 top
U265  DRV5053  [SOT23-3]  103.89,56.9 270 top
U266  DRV5053  [SOT23-3]  103.89,53.09 270 top
U267  DRV5053  [SOT23-3]  103.89,49.28 270 top
U268  DRV5053  [SOT23-3]  103.89,45.47 270 top
U269  DRV5053  [SOT23-3]  107.7,72.14 270 top
U270  DRV5053  [SOT23-3]  107.7,68.33 270 top
U271  DRV5053  [SOT23-3]  107.7,64.52 270 top
U272  DRV5053  [SOT23-3]  107.7,60.71 270 top
U273  DRV5053  [SOT23-3]  107.7,56.9 270 top
U274  DRV5053  [SOT23-3]  107.7,53.09 270 top
U275  DRV5053  [SOT23-3]  107.7,49.28 270 top
U276  DRV5053  [SOT23-3]  107.7,45.47 270 top
U277  AD7680  [SOT23-6]  68.33,72.14 90 top
U278  SN74LVC1G139  [SM8]  68.33,63.25 90 top
U279  SN74HC590A  [SO16]  68.33,50.55 270 top
U280  DRV5053  [SOT23-3]  81.03,72.14 270 top
U281  CD74HC4067  [SSOP24]  101.35,53.09 270 bottom
U282  CD74HC4067  [SSOP24]  86.11,68.33 270 bottom
U283  CD74HC4067  [SSOP24]  86.11,53.09 270 bottom
U284  CD74HC4067  [SSOP24]  101.35,68.33 270 bottom
U285  DRV5053  [SOT23-3]  28.45,103.12 270 top
U286  DRV5053  [SOT23-3]  28.45,99.31 270 top
U287  DRV5053  [SOT23-3]  28.45,95.5 270 top
U288  DRV5053  [SOT23-3]  28.45,91.69 270 top
U289  DRV5053  [SOT23-3]  28.45,87.88 270 top
U290  DRV5053  [SOT23-3]  28.45,84.07 270 top
U291  DRV5053  [SOT23-3]  28.45,80.26 270 top
U292  DRV5053  [SOT23-3]  32.26,106.93 270 top
U293  DRV5053  [SOT23-3]  32.26,103.12 270 top
U294  DRV5053  [SOT23-3]  32.26,99.31 270 top
U295  DRV5053  [SOT23-3]  32.26,95.5 270 top
U296  DRV5053  [SOT23-3]  32.26,91.69 270 top
U297  DRV5053  [SOT23-3]  32.26,87.88 270 top
U298  DRV5053  [SOT23-3]  32.26,84.07 270 top
U299  DRV5053  [SOT23-3]  32.26,80.26 270 top
U300  DRV5053  [SOT23-3]  36.07,106.93 270 top
U301  DRV5053  [SOT23-3]  36.07,103.12 270 top
U302  DRV5053  [SOT23-3]  36.07,99.31 270 top
U303  DRV5053  [SOT23-3]  36.07,95.5 270 top
U304  DRV5053  [SOT23-3]  36.07,91.69 270 top
U305  DRV5053  [SOT23-3]  36.07,87.88 270 top
U306  DRV5053  [SOT23-3]  36.07,84.07 270 top
U307  DRV5053  [SOT23-3]  36.07,80.26 270 top
U308  DRV5053  [SOT23-3]  39.88,106.93 270 top
U309  DRV5053  [SOT23-3]  39.88,103.12 270 top
U310  DRV5053  [SOT23-3]  39.88,99.31 270 top
U311  DRV5053  [SOT23-3]  39.88,95.5 270 top
U312  DRV5053  [SOT23-3]  39.88,91.69 270 top
U313  DRV5053  [SOT23-3]  39.88,87.88 270 top
U314  DRV5053  [SOT23-3]  39.88,84.07 270 top
U315  DRV5053  [SOT23-3]  39.88,80.26 270 top
U316  DRV5053  [SOT23-3]  43.69,106.93 270 top
U317  DRV5053  [SOT23-3]  43.69,103.12 270 top
U318  DRV5053  [SOT23-3]  43.69,99.31 270 top
U319  DRV5053  [SOT23-3]  43.69,95.5 270 top
U320  DRV5053  [SOT23-3]  43.69,91.69 270 top
U321  DRV5053  [SOT23-3]  43.69,87.88 270 top
U322  DRV5053  [SOT23-3]  43.69,84.07 270 top
U323  DRV5053  [SOT23-3]  43.69,80.26 270 top
U324  DRV5053  [SOT23-3]  47.5,106.93 270 top
U325  DRV5053  [SOT23-3]  47.5,103.12 270 top
U326  DRV5053  [SOT23-3]  47.5,99.31 270 top
U327  DRV5053  [SOT23-3]  47.5,95.5 270 top
U328  DRV5053  [SOT23-3]  47.5,91.69 270 top
U329  DRV5053  [SOT23-3]  47.5,87.88 270 top
U330  DRV5053  [SOT23-3]  47.5,84.07 270 top
U331  DRV5053  [SOT23-3]  47.5,80.26 270 top
U332  DRV5053  [SOT23-3]  51.31,106.93 270 top
U333  DRV5053  [SOT23-3]  51.31,103.12 270 top
U334  DRV5053  [SOT23-3]  51.31,99.31 270 top
U335  DRV5053  [SOT23-3]  51.31,95.5 270 top
U336  DRV5053  [SOT23-3]  51.31,91.69 270 top
U337  DRV5053  [SOT23-3]  51.31,87.88 270 top
U338  DRV5053  [SOT23-3]  51.31,84.07 270 top
U339  DRV5053  [SOT23-3]  51.31,80.26 270 top
U340  DRV5053  [SOT23-3]  55.12,106.93 270 top
U341  DRV5053  [SOT23-3]  55.12,103.12 270 top
U342  DRV5053  [SOT23-3]  55.12,99.31 270 top
U343  DRV5053  [SOT23-3]  55.12,95.5 270 top
U344  DRV5053  [SOT23-3]  55.12,91.69 270 top
U345  DRV5053  [SOT23-3]  55.12,87.88 270 top
U346  DRV5053  [SOT23-3]  55.12,84.07 270 top
U347  DRV5053  [SOT23-3]  55.12,80.26 270 top
U348  AD7680  [SOT23-6]  15.75,106.93 90 top
U349  SN74LVC1G139  [SM8]  15.75,98.04 90 top
U350  SN74HC590A  [SO16]  15.75,85.34 270 top
U351  DRV5053  [SOT23-3]  28.45,106.93 270 top
U352  CD74HC4067  [SSOP24]  48.77,87.88 270 bottom
U353  CD74HC4067  [SSOP24]  33.53,103.12 270 bottom
U354  CD74HC4067  [SSOP24]  33.53,87.88 270 bottom
U355  CD74HC4067  [SSOP24]  48.77,103.12 270 bottom
U356  DRV5053  [SOT23-3]  81.03,103.12 270 top
U357  DRV5053  [SOT23-3]  81.03,99.31 270 top
U358  DRV5053  [SOT23-3]  81.03,95.5 270 top
U359  DRV5053  [SOT23-3]  81.03,91.69 270 top
U360  DRV5053  [SOT23-3]  81.03,87.88 270 top
U361  DRV5053  [SOT23-3]  81.03,84.07 270 top
U362  DRV5053  [SOT23-3]  81.03,80.26 270 top
U363  DRV5053  [SOT23-3]  84.84,106.93 270 top
U364  DRV5053  [SOT23-3]  84.84,103.12 270 top
U365  DRV5053  [SOT23-3]  84.84,99.31 270 top
U366  DRV5053  [SOT23-3]  84.84,95.5 270 top
U367  DRV5053  [SOT23-3]  84.84,91.69 270 top
U368  DRV5053  [SOT23-3]  84.84,87.88 270 top
U369  DRV5053  [SOT23-3]  84.84,84.07 270 top
U370  DRV5053  [SOT23-3]  84.84,80.26 270 top
U371  DRV5053  [SOT23-3]  88.65,106.93 270 top
U372  DRV5053  [SOT23-3]  88.65,103.12 270 top
U373  DRV5053  [SOT23-3]  88.65,99.31 270 top
U374  DRV5053  [SOT23-3]  88.65,95.5 270 top
U375  DRV5053  [SOT23-3]  88.65,91.69 270 top
U376  DRV5053  [SOT23-3]  88.65,87.88 270 top
U377  DRV5053  [SOT23-3]  88.65,84.07 270 top
U378  DRV5053  [SOT23-3]  88.65,80.26 270 top
U379  DRV5053  [SOT23-3]  92.46,106.93 270 top
U380  DRV5053  [SOT23-3]  92.46,103.12 270 top
U381  DRV5053  [SOT23-3]  92.46,99.31 270 top
U382  DRV5053  [SOT23-3]  92.46,95.5 270 top
U383  DRV5053  [SOT23-3]  92.46,91.69 270 top
U384  DRV5053  [SOT23-3]  92.46,87.88 270 top
U385  DRV5053  [SOT23-3]  92.46,84.07 270 top
U386  DRV5053  [SOT23-3]  92.46,80.26 270 top
U387  DRV5053  [SOT23-3]  96.27,106.93 270 top
U388  DRV5053  [SOT23-3]  96.27,103.12 270 top
U389  DRV5053  [SOT23-3]  96.27,99.31 270 top
U390  DRV5053  [SOT23-3]  96.27,95.5 270 top
U391  DRV5053  [SOT23-3]  96.27,91.69 270 top
U392  DRV5053  [SOT23-3]  96.27,87.88 270 top
U393  DRV5053  [SOT23-3]  96.27,84.07 270 top
U394  DRV5053  [SOT23-3]  96.27,80.26 270 top
U395  DRV5053  [SOT23-3]  100.08,106.93 270 top
U396  DRV5053  [SOT23-3]  100.08,103.12 270 top
U397  DRV5053  [SOT23-3]  100.08,99.31 270 top
U398  DRV5053  [SOT23-3]  100.08,95.5 270 top
U399  DRV5053  [SOT23-3]  100.08,91.69 270 top
U400  DRV5053  [SOT23-3]  100.08,87.88 270 top
U401  DRV5053  [SOT23-3]  100.08,84.07 270 top
U402  DRV5053  [SOT23-3]  100.08,80.26 270 top
U403  DRV5053  [SOT23-3]  103.89,106.93 270 top
U404  DRV5053  [SOT23-3]  103.89,103.12 270 top
U405  DRV5053  [SOT23-3]  103.89,99.31 270 top
U406  DRV5053  [SOT23-3]  103.89,95.5 270 top
U407  DRV5053  [SOT23-3]  103.89,91.69 270 top
U408  DRV5053  [SOT23-3]  103.89,87.88 270 top
U409  DRV5053  [SOT23-3]  103.89,84.07 270 top
U410  DRV5053  [SOT23-3]  103.89,80.26 270 top
U411  DRV5053  [SOT23-3]  107.7,106.93 270 top
U412  DRV5053  [SOT23-3]  107.7,103.12 270 top
U413  DRV5053  [SOT23-3]  107.7,99.31 270 top
U414  DRV5053  [SOT23-3]  107.7,95.5 270 top
U415  DRV5053  [SOT23-3]  107.7,91.69 270 top
U416  DRV5053  [SOT23-3]  107.7,87.88 270 top
U417  DRV5053  [SOT23-3]  107.7,84.07 270 top
U418  DRV5053  [SOT23-3]  107.7,80.26 270 top
U419  AD7680  [SOT23-6]  68.33,106.93 90 top
U420  SN74LVC1G139  [SM8]  68.33,98.04 90 top
U421  SN74HC590A  [SO16]  68.33,85.34 270 top
U422  DRV5053  [SOT23-3]  81.03,106.93 270 top
U423  CD74HC4067  [SSOP24]  101.35,87.88 270 bottom
U424  CD74HC4067  [SSOP24]  86.11,103.12 270 bottom
U425  CD74HC4067  [SSOP24]  86.11,87.88 270 bottom
U426  CD74HC4067  [SSOP24]  101.35,103.12 270 bottom
U427  DRV5053  [SOT23-3]  28.45,137.92 270 top
U428  DRV5053  [SOT23-3]  28.45,134.11 270 top
U429  DRV5053  [SOT23-3]  28.45,130.3 270 top
U430  DRV5053  [SOT23-3]  28.45,126.49 270 top
U431  DRV5053  [SOT23-3]  28.45,122.68 270 top
U432  DRV5053  [SOT23-3]  28.45,118.87 270 top
U433  DRV5053  [SOT23-3]  28.45,115.06 270 top
U434  DRV5053  [SOT23-3]  32.26,141.73 270 top
U435  DRV5053  [SOT23-3]  32.26,137.92 270 top
U436  DRV5053  [SOT23-3]  32.26,134.11 270 top
U437  DRV5053  [SOT23-3]  32.26,130.3 270 top
U438  DRV5053  [SOT23-3]  32.26,126.49 270 top
U439  DRV5053  [SOT23-3]  32.26,122.68 270 top
U440  DRV5053  [SOT23-3]  32.26,118.87 270 top
U441  DRV5053  [SOT23-3]  32.26,115.06 270 top
U442  DRV5053  [SOT23-3]  36.07,141.73 270 top
U443  DRV5053  [SOT23-3]  36.07,137.92 270 top
U444  DRV5053  [SOT23-3]  36.07,134.11 270 top
U445  DRV5053  [SOT23-3]  36.07,130.3 270 top
U446  DRV5053  [SOT23-3]  36.07,126.49 270 top
U447  DRV5053  [SOT23-3]  36.07,122.68 270 top
U448  DRV5053  [SOT23-3]  36.07,118.87 270 top
U449  DRV5053  [SOT23-3]  36.07,115.06 270 top
U450  DRV5053  [SOT23-3]  39.88,141.73 270 top
U451  DRV5053  [SOT23-3]  39.88,137.92 270 top
U452  DRV5053  [SOT23-3]  39.88,134.11 270 top
U453  DRV5053  [SOT23-3]  39.88,130.3 270 top
U454  DRV5053  [SOT23-3]  39.88,126.49 270 top
U455  DRV5053  [SOT23-3]  39.88,122.68 270 top
U456  DRV5053  [SOT23-3]  39.88,118.87 270 top
U457  DRV5053  [SOT23-3]  39.88,115.06 270 top
U458  DRV5053  [SOT23-3]  43.69,141.73 270 top
U459  DRV5053  [SOT23-3]  43.69,137.92 270 top
U460  DRV5053  [SOT23-3]  43.69,134.11 270 top
U461  DRV5053  [SOT23-3]  43.69,130.3 270 top
U462  DRV5053  [SOT23-3]  43.69,126.49 270 top
U463  DRV5053  [SOT23-3]  43.69,122.68 270 top
U464  DRV5053  [SOT23-3]  43.69,118.87 270 top
U465  DRV5053  [SOT23-3]  43.69,115.06 270 top
U466  DRV5053  [SOT23-3]  47.5,141.73 270 top
U467  DRV5053  [SOT23-3]  47.5,137.92 270 top
U468  DRV5053  [SOT23-3]  47.5,134.11 270 top
U469  DRV5053  [SOT23-3]  47.5,130.3 270 top
U470  DRV5053  [SOT23-3]  47.5,126.49 270 top
U471  DRV5053  [SOT23-3]  47.5,122.68 270 top
U472  DRV5053  [SOT23-3]  47.5,118.87 270 top
U473  DRV5053  [SOT23-3]  47.5,115.06 270 top
U474  DRV5053  [SOT23-3]  51.31,141.73 270 top
U475  DRV5053  [SOT23-3]  51.31,137.92 270 top
U476  DRV5053  [SOT23-3]  51.31,134.11 270 top
U477  DRV5053  [SOT23-3]  51.31,130.3 270 top
U478  DRV5053  [SOT23-3]  51.31,126.49 270 top
U479  DRV5053  [SOT23-3]  51.31,122.68 270 top
U480  DRV5053  [SOT23-3]  51.31,118.87 270 top
U481  DRV5053  [SOT23-3]  51.31,115.06 270 top
U482  DRV5053  [SOT23-3]  55.12,141.73 270 top
U483  DRV5053  [SOT23-3]  55.12,137.92 270 top
U484  DRV5053  [SOT23-3]  55.12,134.11 270 top
U485  DRV5053  [SOT23-3]  55.12,130.3 270 top
U486  DRV5053  [SOT23-3]  55.12,126.49 270 top
U487  DRV5053  [SOT23-3]  55.12,122.68 270 top
U488  DRV5053  [SOT23-3]  55.12,118.87 270 top
U489  DRV5053  [SOT23-3]  55.12,115.06 270 top
U490  AD7680  [SOT23-6]  15.75,141.73 90 top
U491  SN74LVC1G139  [SM8]  15.75,132.84 90 top
U492  SN74HC590A  [SO16]  15.75,120.14 270 top
U493  DRV5053  [SOT23-3]  28.45,141.73 270 top
U494  CD74HC4067  [SSOP24]  48.77,122.68 270 bottom
U495  CD74HC4067  [SSOP24]  33.53,137.92 270 bottom
U496  CD74HC4067  [SSOP24]  33.53,122.68 270 bottom
U497  CD74HC4067  [SSOP24]  48.77,137.92 270 bottom
U498  DRV5053  [SOT23-3]  81.03,137.92 270 top
U499  DRV5053  [SOT23-3]  81.03,134.11 270 top
U500  DRV5053  [SOT23-3]  81.03,130.3 270 top
U501  DRV5053  [SOT23-3]  81.03,126.49 270 top
U502  DRV5053  [SOT23-3]  81.03,122.68 270 top
U503  DRV5053  [SOT23-3]  81.03,118.87 270 top
U504  DRV5053  [SOT23-3]  81.03,115.06 270 top
U505  DRV5053  [SOT23-3]  84.84,141.73 270 top
U506  DRV5053  [SOT23-3]  84.84,137.92 270 top
U507  DRV5053  [SOT23-3]  84.84,134.11 270 top
U508  DRV5053  [SOT23-3]  84.84,130.3 270 top
U509  DRV5053  [SOT23-3]  84.84,126.49 270 top
U510  DRV5053  [SOT23-3]  84.84,122.68 270 top
U511  DRV5053  [SOT23-3]  84.84,118.87 270 top
U512  DRV5053  [SOT23-3]  84.84,115.06 270 top
U513  DRV5053  [SOT23-3]  88.65,141.73 270 top
U514  DRV5053  [SOT23-3]  88.65,137.92 270 top
U515  DRV5053  [SOT23-3]  88.65,134.11 270 top
U516  DRV5053  [SOT23-3]  88.65,130.3 270 top
U517  DRV5053  [SOT23-3]  88.65,126.49 270 top
U518  DRV5053  [SOT23-3]  88.65,122.68 270 top
U519  DRV5053  [SOT23-3]  88.65,118.87 270 top
U520  DRV5053  [SOT23-3]  88.65,115.06 270 top
U521  DRV5053  [SOT23-3]  92.46,141.73 270 top
U522  DRV5053  [SOT23-3]  92.46,137.92 270 top
U523  DRV5053  [SOT23-3]  92.46,134.11 270 top
U524  DRV5053  [SOT23-3]  92.46,130.3 270 top
U525  DRV5053  [SOT23-3]  92.46,126.49 270 top
U526  DRV5053  [SOT23-3]  92.46,122.68 270 top
U527  DRV5053  [SOT23-3]  92.46,118.87 270 top
U528  DRV5053  [SOT23-3]  92.46,115.06 270 top
U529  DRV5053  [SOT23-3]  96.27,141.73 270 top
U530  DRV5053  [SOT23-3]  96.27,137.92 270 top
U531  DRV5053  [SOT23-3]  96.27,134.11 270 top
U532  DRV5053  [SOT23-3]  96.27,130.3 270 top
U533  DRV5053  [SOT23-3]  96.27,126.49 270 top
U534  DRV5053  [SOT23-3]  96.27,122.68 270 top
U535  DRV5053  [SOT23-3]  96.27,118.87 270 top
U536  DRV5053  [SOT23-3]  96.27,115.06 270 top
U537  DRV5053  [SOT23-3]  100.08,141.73 270 top
U538  DRV5053  [SOT23-3]  100.08,137.92 270 top
U539  DRV5053  [SOT23-3]  100.08,134.11 270 top
U540  DRV5053  [SOT23-3]  100.08,130.3 270 top
U541  DRV5053  [SOT23-3]  100.08,126.49 270 top
U542  DRV5053  [SOT23-3]  100.08,122.68 270 top
U543  DRV5053  [SOT23-3]  100.08,118.87 270 top
U544  DRV5053  [SOT23-3]  100.08,115.06 270 top
U545  DRV5053  [SOT23-3]  103.89,141.73 270 top
U546  DRV5053  [SOT23-3]  103.89,137.92 270 top
U547  DRV5053  [SOT23-3]  103.89,134.11 270 top
U548  DRV5053  [SOT23-3]  103.89,130.3 270 top
U549  DRV5053  [SOT23-3]  103.89,126.49 270 top
U550  DRV5053  [SOT23-3]  103.89,122.68 270 top
U551  DRV5053  [SOT23-3]  103.89,118.87 270 top
U552  DRV5053  [SOT23-3]  103.89,115.06 270 top
U553  DRV5053  [SOT23-3]  107.7,141.73 270 top
U554  DRV5053  [SOT23-3]  107.7,137.92 270 top
U555  DRV5053  [SOT23-3]  107.7,134.11 270 top
U556  DRV5053  [SOT23-3]  107.7,130.3 270 top
U557  DRV5053  [SOT23-3]  107.7,126.49 270 top
U558  DRV5053  [SOT23-3]  107.7,122.68 270 top
U559  DRV5053  [SOT23-3]  107.7,118.87 270 top
U560  DRV5053  [SOT23-3]  107.7,115.06 270 top
U561  AD7680  [SOT23-6]  68.33,141.73 90 top
U562  SN74LVC1G139  [SM8]  68.33,132.84 90 top
U563  SN74HC590A  [SO16]  68.33,120.14 270 top
U564  DRV5053  [SOT23-3]  81.03,141.73 270 top
U565  CD74HC4067  [SSOP24]  101.35,122.68 270 bottom
U566  CD74HC4067  [SSOP24]  86.11,137.92 270 bottom
U567  CD74HC4067  [SSOP24]  86.11,122.68 270 bottom
U568  CD74HC4067  [SSOP24]  101.35,137.92 270 bottom
U569  DRV5053  [SOT23-3]  28.45,172.72 270 top
U570  DRV5053  [SOT23-3]  28.45,168.91 270 top
U571  DRV5053  [SOT23-3]  28.45,165.1 270 top
U572  DRV5053  [SOT23-3]  28.45,161.29 270 top
U573  DRV5053  [SOT23-3]  28.45,157.48 270 top
U574  DRV5053  [SOT23-3]  28.45,153.67 270 top
U575  DRV5053  [SOT23-3]  28.45,149.86 270 top
U576  DRV5053  [SOT23-3]  32.26,176.53 270 top
U577  DRV5053  [SOT23-3]  32.26,172.72 270 top
U578  DRV5053  [SOT23-3]  32.26,168.91 270 top
U579  DRV5053  [SOT23-3]  32.26,165.1 270 top
U580  DRV5053  [SOT23-3]  32.26,161.29 270 top
U581  DRV5053  [SOT23-3]  32.26,157.48 270 top
U582  DRV5053  [SOT23-3]  32.26,153.67 270 top
U583  DRV5053  [SOT23-3]  32.26,149.86 270 top
U584  DRV5053  [SOT23-3]  36.07,176.53 270 top
U585  DRV5053  [SOT23-3]  36.07,172.72 270 top
U586  DRV5053  [SOT23-3]  36.07,168.91 270 top
U587  DRV5053  [SOT23-3]  36.07,165.1 270 top
U588  DRV5053  [SOT23-3]  36.07,161.29 270 top
U589  DRV5053  [SOT23-3]  36.07,157.48 270 top
U590  DRV5053  [SOT23-3]  36.07,153.67 270 top
U591  DRV5053  [SOT23-3]  36.07,149.86 270 top
U592  DRV5053  [SOT23-3]  39.88,176.53 270 top
U593  DRV5053  [SOT23-3]  39.88,172.72 270 top
U594  DRV5053  [SOT23-3]  39.88,168.91 270 top
U595  DRV5053  [SOT23-3]  39.88,165.1 270 top
U596  DRV5053  [SOT23-3]  39.88,161.29 270 top
U597  DRV5053  [SOT23-3]  39.88,157.48 270 top
U598  DRV5053  [SOT23-3]  39.88,153.67 270 top
U599  DRV5053  [SOT23-3]  39.88,149.86 270 top
U600  DRV5053  [SOT23-3]  43.69,176.53 270 top
U601  DRV5053  [SOT23-3]  43.69,172.72 270 top
U602  DRV5053  [SOT23-3]  43.69,168.91 270 top
U603  DRV5053  [SOT23-3]  43.69,165.1 270 top
U604  DRV5053  [SOT23-3]  43.69,161.29 270 top
U605  DRV5053  [SOT23-3]  43.69,157.48 270 top
U606  DRV5053  [SOT23-3]  43.69,153.67 270 top
U607  DRV5053  [SOT23-3]  43.69,149.86 270 top
U608  DRV5053  [SOT23-3]  47.5,176.53 270 top
U609  DRV5053  [SOT23-3]  47.5,172.72 270 top
U610  DRV5053  [SOT23-3]  47.5,168.91 270 top
U611  DRV5053  [SOT23-3]  47.5,165.1 270 top
U612  DRV5053  [SOT23-3]  47.5,161.29 270 top
U613  DRV5053  [SOT23-3]  47.5,157.48 270 top
U614  DRV5053  [SOT23-3]  47.5,153.67 270 top
U615  DRV5053  [SOT23-3]  47.5,149.86 270 top
U616  DRV5053  [SOT23-3]  51.31,176.53 270 top
U617  DRV5053  [SOT23-3]  51.31,172.72 270 top
U618  DRV5053  [SOT23-3]  51.31,168.91 270 top
U619  DRV5053  [SOT23-3]  51.31,165.1 270 top
U620  DRV5053  [SOT23-3]  51.31,161.29 270 top
U621  DRV5053  [SOT23-3]  51.31,157.48 270 top
U622  DRV5053  [SOT23-3]  51.31,153.67 270 top
U623  DRV5053  [SOT23-3]  51.31,149.86 270 top
U624  DRV5053  [SOT23-3]  55.12,176.53 270 top
U625  DRV5053  [SOT23-3]  55.12,172.72 270 top
U626  DRV5053  [SOT23-3]  55.12,168.91 270 top
U627  DRV5053  [SOT23-3]  55.12,165.1 270 top
U628  DRV5053  [SOT23-3]  55.12,161.29 270 top
U629  DRV5053  [SOT23-3]  55.12,157.48 270 top
U630  DRV5053  [SOT23-3]  55.12,153.67 270 top
U631  DRV5053  [SOT23-3]  55.12,149.86 270 top
U632  AD7680  [SOT23-6]  15.75,176.53 90 top
U633  SN74LVC1G139  [SM8]  15.75,167.64 90 top
U634  SN74HC590A  [SO16]  15.75,154.94 270 top
U635  DRV5053  [SOT23-3]  28.45,176.53 270 top
U636  CD74HC4067  [SSOP24]  48.77,157.48 270 bottom
U637  CD74HC4067  [SSOP24]  33.53,172.72 270 bottom
U638  CD74HC4067  [SSOP24]  33.53,157.48 270 bottom
U639  CD74HC4067  [SSOP24]  48.77,172.72 270 bottom
U640  DRV5053  [SOT23-3]  81.03,172.72 270 top
U641  DRV5053  [SOT23-3]  81.03,168.91 270 top
U642  DRV5053  [SOT23-3]  81.03,165.1 270 top
U643  DRV5053  [SOT23-3]  81.03,161.29 270 top
U644  DRV5053  [SOT23-3]  81.03,157.48 270 top
U645  DRV5053  [SOT23-3]  81.03,153.67 270 top
U646  DRV5053  [SOT23-3]  81.03,149.86 270 top
U647  DRV5053  [SOT23-3]  84.84,176.53 270 top
U648  DRV5053  [SOT23-3]  84.84,172.72 270 top
U649  DRV5053  [SOT23-3]  84.84,168.91 270 top
U650  DRV5053  [SOT23-3]  84.84,165.1 270 top
U651  DRV5053  [SOT23-3]  84.84,161.29 270 top
U652  DRV5053  [SOT23-3]  84.84,157.48 270 top
U653  DRV5053  [SOT23-3]  84.84,153.67 270 top
U654  DRV5053  [SOT23-3]  84.84,149.86 270 top
U655  DRV5053  [SOT23-3]  88.65,176.53 270 top
U656  DRV5053  [SOT23-3]  88.65,172.72 270 top
U657  DRV5053  [SOT23-3]  88.65,168.91 270 top
U658  DRV5053  [SOT23-3]  88.65,165.1 270 top
U659  DRV5053  [SOT23-3]  88.65,161.29 270 top
U660  DRV5053  [SOT23-3]  88.65,157.48 270 top
U661  DRV5053  [SOT23-3]  88.65,153.67 270 top
U662  DRV5053  [SOT23-3]  88.65,149.86 270 top
U663  DRV5053  [SOT23-3]  92.46,176.53 270 top
U664  DRV5053  [SOT23-3]  92.46,172.72 270 top
U665  DRV5053  [SOT23-3]  92.46,168.91 270 top
U666  DRV5053  [SOT23-3]  92.46,165.1 270 top
U667  DRV5053  [SOT23-3]  92.46,161.29 270 top
U668  DRV5053  [SOT23-3]  92.46,157.48 270 top
U669  DRV5053  [SOT23-3]  92.46,153.67 270 top
U670  DRV5053  [SOT23-3]  92.46,149.86 270 top
U671  DRV5053  [SOT23-3]  96.27,176.53 270 top
U672  DRV5053  [SOT23-3]  96.27,172.72 270 top
U673  DRV5053  [SOT23-3]  96.27,168.91 270 top
U674  DRV5053  [SOT23-3]  96.27,165.1 270 top
U675  DRV5053  [SOT23-3]  96.27,161.29 270 top
U676  DRV5053  [SOT23-3]  96.27,157.48 270 top
U677  DRV5053  [SOT23-3]  96.27,153.67 270 top
U678  DRV5053  [SOT23-3]  96.27,149.86 270 top
U679  DRV5053  [SOT23-3]  100.08,176.53 270 top
U680  DRV5053  [SOT23-3]  100.08,172.72 270 top
U681  DRV5053  [SOT23-3]  100.08,168.91 270 top
U682  DRV5053  [SOT23-3]  100.08,165.1 270 top
U683  DRV5053  [SOT23-3]  100.08,161.29 270 top
U684  DRV5053  [SOT23-3]  100.08,157.48 270 top
U685  DRV5053  [SOT23-3]  100.08,153.67 270 top
U686  DRV5053  [SOT23-3]  100.08,149.86 270 top
U687  DRV5053  [SOT23-3]  103.89,176.53 270 top
U688  DRV5053  [SOT23-3]  103.89,172.72 270 top
U689  DRV5053  [SOT23-3]  103.89,168.91 270 top
U690  DRV5053  [SOT23-3]  103.89,165.1 270 top
U691  DRV5053  [SOT23-3]  103.89,161.29 270 top
U692  DRV5053  [SOT23-3]  103.89,157.48 270 top
U693  DRV5053  [SOT23-3]  103.89,153.67 270 top
U694  DRV5053  [SOT23-3]  103.89,149.86 270 top
U695  DRV5053  [SOT23-3]  107.7,176.53 270 top
U696  DRV5053  [SOT23-3]  107.7,172.72 270 top
U697  DRV5053  [SOT23-3]  107.7,168.91 270 top
U698  DRV5053  [SOT23-3]  107.7,165.1 270 top
U699  DRV5053  [SOT23-3]  107.7,161.29 270 top
U700  DRV5053  [SOT23-3]  107.7,157.48 270 top
U701  DRV5053  [SOT23-3]  107.7,153.67 270 top
U702  DRV5053  [SOT23-3]  107.7,149.86 270 top
U703  AD7680  [SOT23-6]  68.33,176.53 90 top
U704  SN74LVC1G139  [SM8]  68.33,167.64 90 top
U705  SN74HC590A  [SO16]  68.33,154.94 270 top
U706  DRV5053  [SOT23-3]  81.03,176.53 270 top
U707  CD74HC4067  [SSOP24]  101.35,157.48 270 bottom
U708  CD74HC4067  [SSOP24]  86.11,172.72 270 bottom
U709  CD74HC4067  [SSOP24]  86.11,157.48 270 bottom
U710  CD74HC4067  [SSOP24]  101.35,172.72 270 bottom
U$1  [SFE_LOGO_FLAME_.1]  18.67,11.43 0 bottom
U$2  [SFE_LOGO_FLAME_.1]  23.11,21.59 270 top
U$3  [GND]  16.38,32.26 0 bottom
U$4  [#CLR]  15.62,19.56 0 bottom
U$5  [3#3V]  16.64,14.48 0 bottom
U$6  [AOUT]  17.91,29.72 0 bottom
U$7  [CLK]  16,27.18 0 bottom
U$8  [MISO]  17.02,24.64 0 bottom
U$9  [SCK]  16,16.89 0 bottom
U$10  [CS]  14.86,22.1 0 bottom
U$11  [GND]  68.96,32.26 0 bottom
U$12  [3#3V]  69.22,14.48 0 bottom
U$13  [AOUT]  70.48,29.72 0 bottom
U$14  [CLK]  68.58,27.18 0 bottom
U$15  [MISO]  69.6,24.64 0 bottom
U$16  [SCK]  68.58,16.89 0 bottom
U$17  [#CLR]  68.2,19.56 0 bottom
U$18  [CS]  67.44,22.1 0 bottom
U$19  [SFE_LOGO_FLAME_.1]  71.25,11.43 0 bottom
U$20  [SFE_LOGO_FLAME_.1]  75.69,21.59 270 top
U$21  [GND]  16.38,67.06 0 bottom
U$22  [3#3V]  16.64,49.28 0 bottom
U$23  [AOUT]  17.91,64.52 0 bottom
U$24  [CLK]  16,61.98 0 bottom
U$25  [MISO]  17.02,59.44 0 bottom
U$26  [SCK]  16,51.69 0 bottom
U$27  [#CLR]  15.62,54.36 0 bottom
U$28  [CS]  14.86,56.9 0 bottom
U$29  [SFE_LOGO_FLAME_.1]  18.67,46.23 0 bottom
U$30  [SFE_LOGO_FLAME_.1]  23.11,56.39 270 top
U$31  [GND]  68.96,67.06 0 bottom
U$32  [3#3V]  69.22,49.28 0 bottom
U$33  [AOUT]  70.48,64.52 0 bottom
U$34  [CLK]  68.58,61.98 0 bottom
U$35  [MISO]  69.6,59.44 0 bottom
U$36  [SCK]  68.58,51.69 0 bottom
U$37  [#CLR]  68.2,54.36 0 bottom
U$38  [CS]  67.44,56.9 0 bottom
U$39  [SFE_LOGO_FLAME_.1]  71.25,46.23 0 bottom
U$40  [SFE_LOGO_FLAME_.1]  75.69,56.39 270 top
U$41  [GND]  16.38,101.85 0 bottom
U$42  [3#3V]  16.64,84.07 0 bottom
U$43  [AOUT]  17.91,99.31 0 bottom
U$44  [CLK]  16,96.77 0 bottom
U$45  [MISO]  17.02,94.23 0 bottom
U$46  [SCK]  16,86.49 0 bottom
U$47  [#CLR]  15.62,89.15 0 bottom
U$48  [CS]  14.86,91.69 0 bottom
U$49  [SFE_LOGO_FLAME_.1]  18.67,81.03 0 bottom
U$50  [SFE_LOGO_FLAME_.1]  23.11,91.19 270 top
U$51  [GND]  68.96,101.85 0 bottom
U$52  [3#3V]  69.22,84.07 0 bottom
U$53  [AOUT]  70.48,99.31 0 bottom
U$54  [CLK]  68.58,96.77 0 bottom
U$55  [MISO]  69.6,94.23 0 bottom
U$56  [SCK]  68.58,86.49 0 bottom
U$57  [#CLR]  68.2,89.15 0 bottom
U$58  [CS]  67.44,91.69 0 bottom
U$59  [SFE_LOGO_FLAME_.1]  71.25,81.03 0 bottom
U$60  [SFE_LOGO_FLAME_.1]  75.69,91.19 270 top
U$61  [GND]  16.38,136.65 0 bottom
U$62  [3#3V]  16.64,118.87 0 bottom
U$63  [AOUT]  17.91,134.11 0 bottom
U$64  [CLK]  16,131.57 0 bottom
U$65  [MISO]  17.02,129.03 0 bottom
U$66  [SCK]  16,121.29 0 bottom
U$67  [#CLR]  15.62,123.95 0 bottom
U$68  [CS]  14.86,126.49 0 bottom
U$69  [SFE_LOGO_FLAME_.1]  18.67,115.82 0 bottom
U$70  [SFE_LOGO_FLAME_.1]  23.11,125.98 270 top
U$71  [GND]  68.96,136.65 0 bottom
U$72  [3#3V]  69.22,118.87 0 bottom
U$73  [AOUT]  70.48,134.11 0 bottom
U$74  [CLK]  68.58,131.57 0 bottom
U$75  [MISO]  69.6,129.03 0 bottom
U$76  [SCK]  68.58,121.29 0 bottom
U$77  [#CLR]  68.2,123.95 0 bottom
U$78  [CS]  67.44,126.49 0 bottom
U$79  [SFE_LOGO_FLAME_.1]  71.25,115.82 0 bottom
U$80  [SFE_LOGO_FLAME_.1]  75.69,125.98 270 top
U$81  [GND]  16.38,171.45 0 bottom
U$82  [3#3V]  16.64,153.67 0 bottom
U$83  [AOUT]  17.91,168.91 0 bottom
U$84  [CLK]  16,166.37 0 bottom
U$85  [MISO]  17.02,163.83 0 bottom
U$86  [SCK]  16,156.08 0 bottom
U$87  [#CLR]  15.62,158.75 0 bottom
U$88  [CS]  14.86,161.29 0 bottom
U$89  [SFE_LOGO_FLAME_.1]  18.67,150.62 0 bottom
U$90  [SFE_LOGO_FLAME_.1]  23.11,160.78 270 top
U$91  [GND]  68.96,171.45 0 bottom
U$92  [3#3V]  69.22,153.67 0 bottom
U$93  [AOUT]  70.48,168.91 0 bottom
U$94  [CLK]  68.58,166.37 0 bottom
U$95  [MISO]  69.6,163.83 0 bottom
U$96  [SCK]  68.58,156.08 0 bottom
U$97  [#CLR]  68.2,158.75 0 bottom
U$98  [CS]  67.44,161.29 0 bottom
U$99  [SFE_LOGO_FLAME_.1]  71.25,150.62 0 bottom
U$100  [SFE_LOGO_FLAME_.1]  75.69,160.78 270 top